# Altium PCB AWT25-000093_ZIM1.PcbDoc (part 3 of 4)
Units mm, origin at the board's own origin, x right, y up, seen from the top; angles counter-clockwise.
Board outline 210 x 108 mm, 6 copper layers (Top Layer, Mid-Layer 1, Internal Plane 2, Power, Mid-Layer 2, Bottom Layer); 303 components, 298 nets, 1319 pads, 1113 vias.
Unrouted connection lines stored in the file: 85.
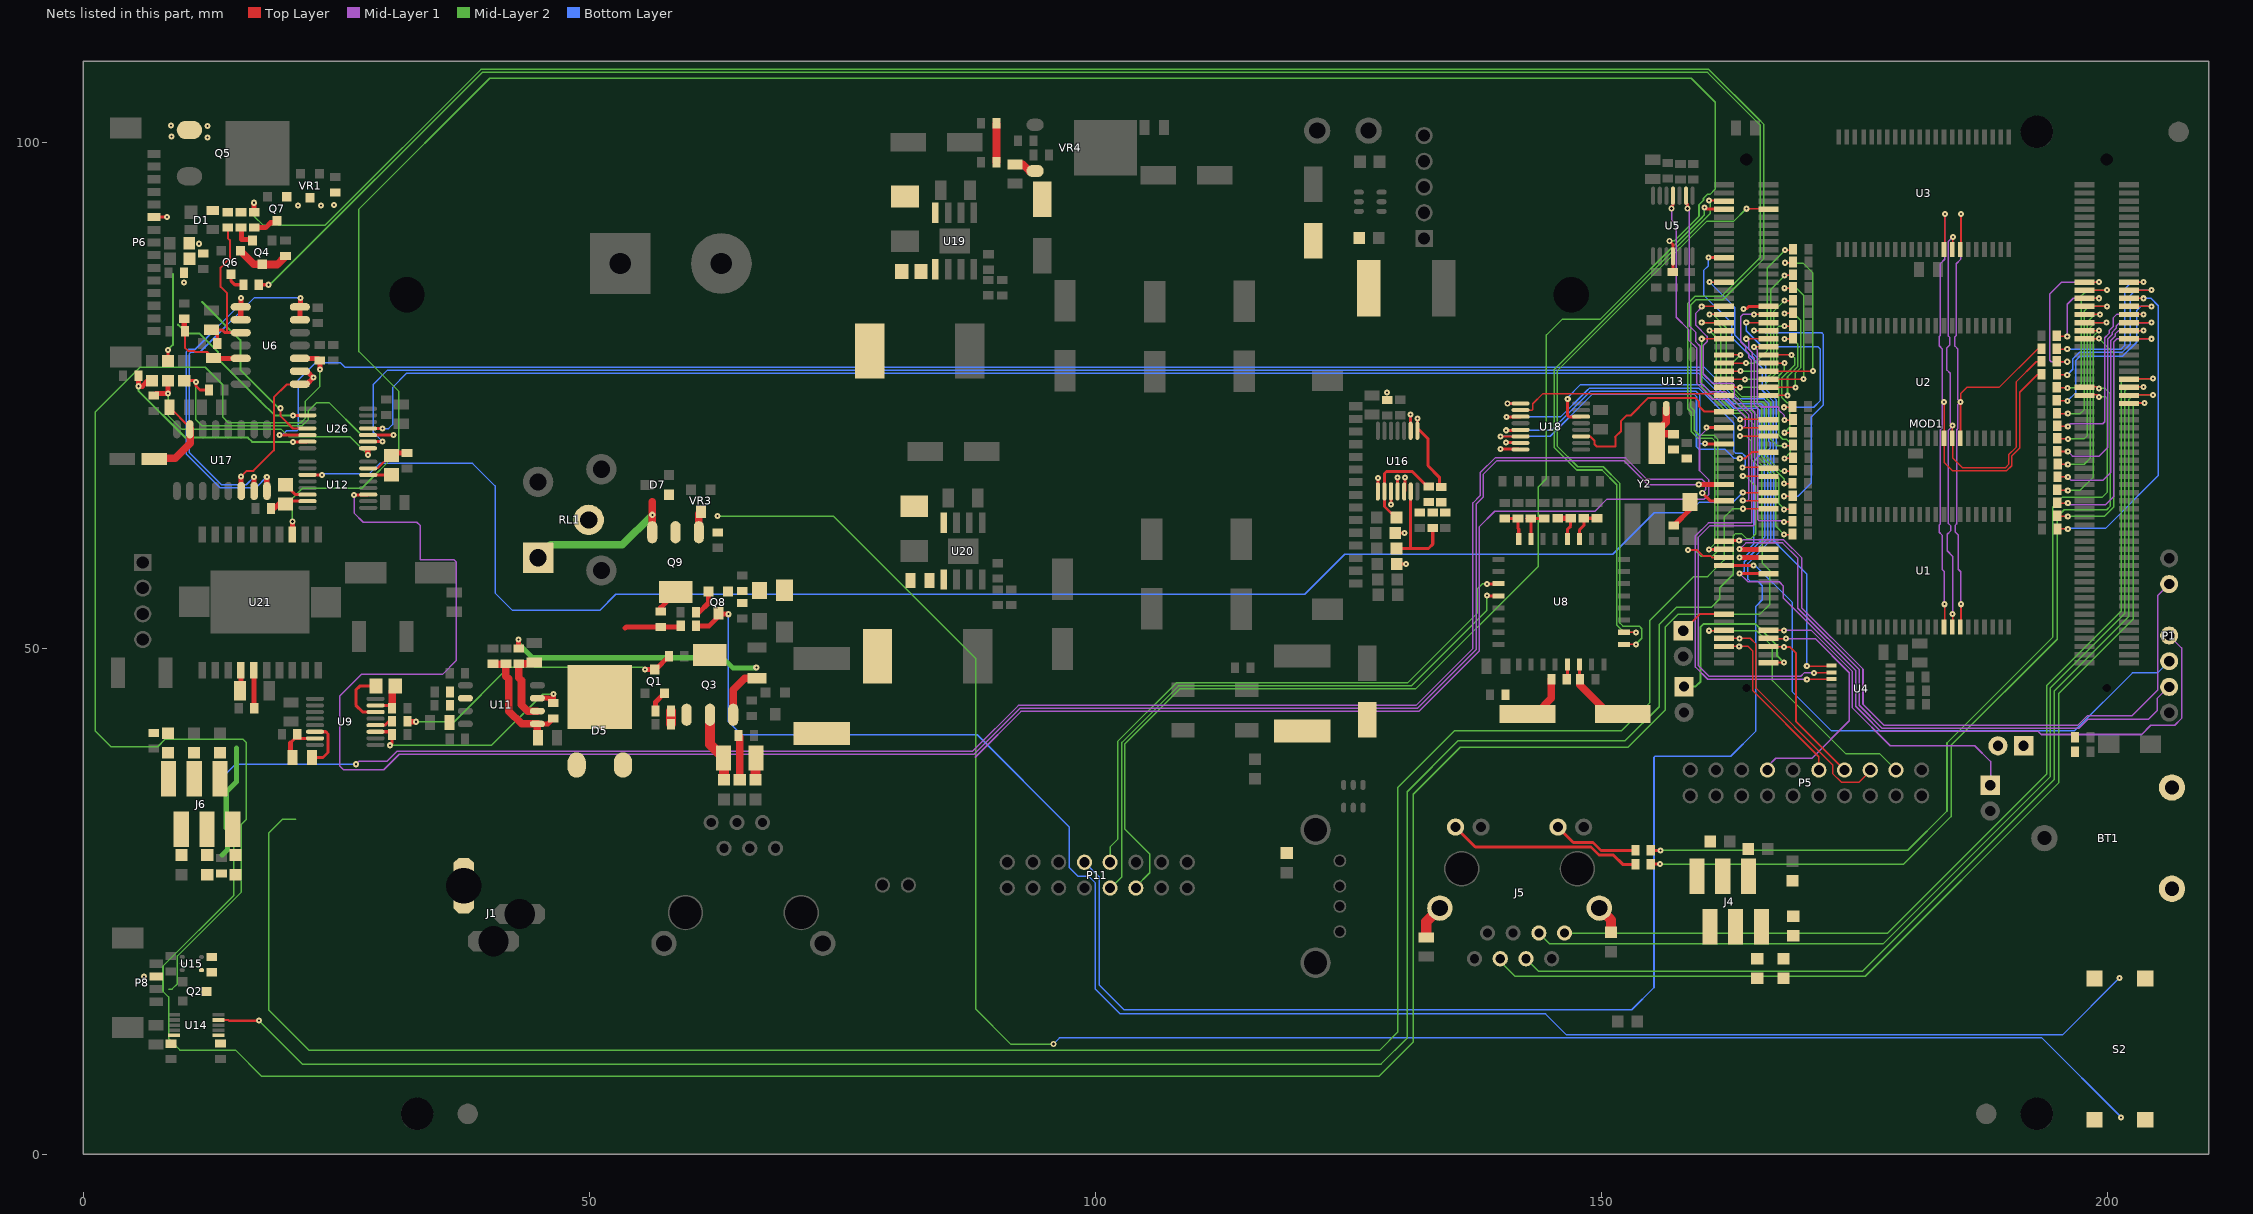
[diagram p7: the nets of this part, all layers, seen from the top]

## Via types
v1: diameter 0.6, hole 0.2, Top Layer to Bottom Layer, tented both sides, 894 vias
v2: diameter 0.6, hole 0.3, Top Layer to Bottom Layer, tented both sides, 199 vias
v3: diameter 0.6, hole 0.2, Top Layer to Bottom Layer, 18 vias
v4: diameter 0.4, hole 0.3, Top Layer to Bottom Layer, tented both sides, 2 vias

## Nets (pads, with @x,y where several pads share a name; then routed paths per layer and width w, separated by ;. In a path a pad name is that pad's centre, name@x,y a point inside that pad or via, vN(x,y) a via of type N, cw(c..) or ccw(c..) an arc to the next point about the centre after c; other vN are vias at no path point) (continued)
D13: R25.2 U1.36 U2.36 U3.36 | length 69
  Top Layer w0.15: v1(183.835,74.332) 183.86,70.744 183.861,70.699 183.872,70.688 183.861,70.676 183.861,68.338 184.668,67.53 190.013,67.53 190.515,68.033 190.515,68.982 191.303,69.769 191.303,75.272 193.047,77.016 193.455,77.016 R25.2@193.501,77.016 ; U1.36@183.872,52.038 183.877,52.043 183.886,52.052 183.886,52.094 v1(183.886,54.342) ; U3.36@183.872,89.338 183.877,89.343 183.886,89.352 183.886,89.393 v1(183.911,92.874)
  Mid-Layer 1 w0.15: v1@183.81,74.307 v1@183.81,74.332 ; v1@183.861,74.332 183.848,74.319 183.632,74.103 183.632,71.741 183.48,71.589 183.48,62.292 183.353,62.165 183.353,61.454 183.632,61.175 183.632,57.797 183.873,57.556 183.873,54.342 v1@183.873,54.329 ; v1@183.886,74.332 183.861,74.357 183.657,74.561 183.657,79.564 183.353,79.869 183.353,80.784 183.48,80.911 183.48,87.997 183.911,88.429 v1(183.911,92.874)
D14: R27.2 U1.37 U2.37 U3.37 | length 62.2
  Top Layer w0.15: v1(184.648,71.995) 184.648,70.744 184.648,70.711 184.672,70.688 184.672,68.822 185.664,67.83 189.888,67.83 190.211,68.152 190.211,69.101 190.947,69.838 190.947,76.288 192.949,78.29 193.442,78.29 R27.2@193.488,78.29 ; U1.37@184.672,52.038 184.673,52.039 184.673,52.094 v1(184.673,53.377) ; U3.37@184.672,89.338 184.673,89.339 184.674,89.393 v1(184.699,90.639)
  Mid-Layer 1 w0.15: 184.267,71.538 184.267,62.318 184.47,62.115 184.47,61.581 184.14,61.251 184.14,59.625 184.698,59.067 v1@184.698,53.377 ; 184.318,71.589 v1@184.682,71.953 ; v1@184.648,53.326 v1@184.648,53.377 ; v1@184.648,90.588 184.259,90.199 184.259,80.834 184.411,80.682 184.411,79.971 184.11,79.67 184.11,77.478 184.436,77.151 184.436,72.198 184.644,71.991 v1@184.682,71.953 ; v1@184.69,71.944 v1@184.682,71.953 ; v1@184.699,71.97 184.686,71.957 v1@184.682,71.953
D15: R29.2 U1.38 U2.38 U3.38 | length 59.6
  Top Layer w0.15: v1(185.461,74.332) 185.461,75.145 186.07,75.754 189.271,75.754 193.056,79.54 193.442,79.54 R29.2@193.488,79.54
  Top Layer w0.2: v1(185.461,74.332) 185.461,70.744 185.461,70.699 U2.38@185.472,70.688 ; U1.38@185.472,52.038 185.477,52.043 185.486,52.052 185.486,52.094 v1(185.486,54.342) ; U3.38@185.472,89.338 185.477,89.343 185.486,89.352 185.486,89.394 v1(185.486,92.874)
  Mid-Layer 1 w0.15: v1(185.461,74.332) v1@185.435,74.307 ; v1@185.461,92.849 185.461,88.404 185.029,87.972 185.029,80.885 184.902,80.758 184.902,79.844 185.207,79.539 185.207,74.535 v1@185.435,74.307 ; v1@185.473,54.329 185.473,54.342 185.473,57.556 185.232,57.797 185.232,61.175 184.953,61.454 184.953,62.165 185.08,62.292 185.08,71.589 185.207,71.716 185.207,74.078 v1@185.435,74.307
DA0: MOD1.A68 R3.2 | length 9.7
  Top Layer w0.15: MOD1.A68@166.5,74.965 166.502,74.967 v1(168.367,74.967) ; v1@168.076,80.543 168.901,80.543 R3.2@168.947,80.543
  Mid-Layer 2 w0.15: v1(168.062,80.53) 168.9,80.53 169.362,80.068 169.362,77.809 168.367,76.814 v1(168.367,74.967)
DA1: MOD1.A69 R5.2 | length 11.9
  Top Layer w0.15: MOD1.A69@162.1,75.765 v1(163.693,75.754) ; v1(168.062,81.825) 168.901,81.825 168.912,81.825 168.919,81.818 R5.2@168.947,81.818
  Mid-Layer 2 w0.15: v1(163.693,75.754) 165.837,75.765 167.325,77.253 167.325,81.622 167.528,81.825 v1(168.062,81.825)
DA2: MOD1.A70 R7.2 | length 12.3
  Top Layer w0.15: MOD1.A70@166.5,75.765 166.511,75.754 v1(169.154,75.754) ; v1(168.062,83.07) 168.901,83.07 168.946,83.07 R7.2@168.947,83.068
  Mid-Layer 2 w0.15: v1(168.062,83.07) 168.976,83.07 169.662,82.384 169.662,77.685 169.154,77.177 v1(169.154,75.754)
DA3: MOD1.A71 R10.2 | length 13.7
  Top Layer w0.15: MOD1.A71@162.1,76.565 v1(164.176,76.542) ; v1(168.062,84.34) 168.901,84.34 168.926,84.34 R10.2@168.947,84.318
  Mid-Layer 2 w0.15: v1(164.176,76.542) 166.213,76.565 167.02,77.372 167.02,83.298 v1(168.062,84.34) v1@168.189,84.34
DA4: MOD1.A72 R12.2 | length 14.8
  Top Layer w0.15: MOD1.A72@166.5,76.565 v1@169.939,76.565 ; v1(168.062,85.559) 168.901,85.559 168.938,85.559 R12.2@168.947,85.568
  Mid-Layer 2 w0.15: v1@168.062,85.533 v1(168.062,85.559) 169.256,85.559 169.967,84.848 v1(169.967,76.593)
DA5: MOD1.A73 R14.2 | length 15.5
  Top Layer w0.15: MOD1.A73@162.1,77.365 v1(163.744,77.38) ; v1(168.087,86.829) 168.917,86.829 168.952,86.829 R14.2@168.963,86.84
  Mid-Layer 2 w0.15: v1(163.744,77.38) 166.589,77.365 166.69,77.467 166.69,85.406 168.087,86.803 v1(168.087,86.829) v1@168.138,86.829
DA6: MOD1.A74 R16.2 | length 18.1
  Top Layer w0.15: MOD1.A74@166.5,77.365 v1@170.866,77.365 ; v1(168.113,88.073) 168.9,88.073 R16.2@168.917,88.09 ; R16.2@168.917,88.09 R16.2@168.963,88.09
  Mid-Layer 2 w0.15: v1@168.087,88.048 168.113,88.048 169.891,88.048 170.881,87.057 v1(170.881,77.38)
DA7: MOD1.A75 R18.2 | length 16.3
  Top Layer w0.15: MOD1.A75@162.1,78.165 v1(164.252,78.167) ; v1(168.113,89.318) 168.917,89.318 168.941,89.318 R18.2@168.963,89.34
  Mid-Layer 2 w0.15: v1(164.252,78.167) 165.138,78.165 166.385,79.412 166.385,87.591 v1(168.113,89.318)
DA8: MOD1.A76 R20.2 | length 13.2
  Top Layer w0.15: MOD1.A76@166.5,78.165 v1@168.059,78.165 ; v1(168.062,68.744) 168.917,68.744 168.942,68.744 R20.2@168.963,68.765
  Mid-Layer 2 w0.15: v1@167.96,68.744 v1(168.062,68.744) 168.646,69.328 168.646,70.268 168.265,70.649 167.9,70.649 167.5,71.049 167.5,76.92 168.062,77.482 v1(168.062,78.167)
DA9: MOD1.A77 R22.2 | length 15.7
  Top Layer w0.15: MOD1.A77@162.1,78.965 v1(163.718,78.98) ; v1(168.062,70.014) 168.892,70.014 168.937,70.014 R22.2@168.938,70.015
  Mid-Layer 2 w0.15: v1(163.718,78.98) 162.88,78.142 162.88,75.82 163.885,74.815 166.16,74.815 166.725,74.25 166.725,70.614 167.325,70.014 v1(168.062,70.014)
DA10: MOD1.A78 R24.2 | length 12.2
  Top Layer w0.15: MOD1.A78@166.5,78.965 v1@168.763,78.965 ; v1(168.062,71.284) 168.892,71.284 168.932,71.284 R24.2@168.938,71.29
  Mid-Layer 2 w0.15: v1@167.909,71.284 v1(168.062,71.284) 168.6,71.822 168.6,74.075 168.419,74.256 168.294,74.256 167.8,74.75 167.8,76.7 168.368,77.268 168.382,77.268 169.062,77.948 169.062,78.666 v1(168.773,78.955)
DA11: MOD1.A80 R26.2 | length 11.8
  Top Layer w0.15: v1(165.073,79.765) MOD1.A80@166.5,79.765 ; v1(168.062,72.529) 168.892,72.529 168.927,72.529 R26.2@168.938,72.54
  Mid-Layer 1 w0.15: v1(165.073,79.765) 165.4,79.438 165.4,74.178 165.752,73.826 167.452,73.826 167.512,73.766 167.512,73.541 168.062,72.991 v1(168.062,72.529)
DA12: MOD1.A81 R28.2 | length 26.9
  Top Layer w0.15: v1(159.893,80.565) MOD1.A81@162.1,80.565 ; v1(168.036,61.226) 168.04,61.229 168.876,61.229 R28.2@168.922,61.229
  Mid-Layer 2 w0.15: v1(159.893,80.565) 159.893,75.807 162.511,73.189 163.947,73.189 165.1,72.036 165.1,68.8 167.2,66.7 167.2,62.062 v1@168.033,61.229 ; v1@167.805,61.229 v1@168.033,61.229 ; v1(168.036,61.226) v1@168.033,61.229 ; v1@168.04,61.229 168.036,61.229 v1@168.033,61.229
DA13: MOD1.A82 R30.2 | length 24.1
  Top Layer w0.15: v1(164.293,80.565) MOD1.A82@166.5,80.565 ; v1(168.036,62.47) 168.876,62.47 168.913,62.47 R30.2@168.922,62.479
  Mid-Layer 1 w0.15: v1(164.293,80.565) 164.539,80.32 164.539,79.552 164.862,79.229 164.862,78.878 165.096,78.644 165.096,74.033 165.328,73.801 ; 165.328,73.826 165.328,73.801 ; v1(168.036,62.47) 167.935,62.572 165.577,62.572 165.425,62.724 165.425,73.704 165.328,73.801
DA14: MOD1.A83 R31.2 | length 24.1
  Top Layer w0.15: v1(160.673,81.365) MOD1.A83@162.1,81.365 ; v1(168.036,63.715) 168.876,63.715 168.908,63.715 R31.2@168.922,63.729
  Mid-Layer 2 w0.15: v1(160.673,81.365) 161.331,80.707 161.331,75.069 162.906,73.494 164.831,73.494 165.4,72.925 165.4,68.925 167.5,66.825 167.5,64.28 168.036,63.744 v1(168.036,63.715)
DA15: MOD1.A84 R32.2 | length 27.7
  Top Layer w0.15: v1(165.073,81.365) MOD1.A84@166.5,81.365 ; v1(168.036,65.01) 168.876,65.01 168.915,65.01 R32.2@168.922,65.004
  Bottom Layer w0.15: v1(165.073,81.365) 165.982,81.365 166.182,81.165 171.745,81.165 171.918,80.992 171.918,74.048 170.703,72.833 170.703,66.306 169.408,65.01 v1(168.036,65.01)
DA16: MOD1.A85 R33.2 | length 24.4
  Top Layer w0.15: v1(159.893,82.165) MOD1.A85@162.1,82.165 ; v1(168.036,66.255) 168.876,66.255 168.921,66.255 R33.2@168.922,66.254
  Mid-Layer 2 w0.15: v1(159.893,82.165) 161.346,82.165 161.763,81.749 161.763,75.787 163.65,73.9 165.65,73.9 165.825,73.725 165.825,68.925 168.036,66.714 v1(168.036,66.255)
DA17: MOD1.A86 R34.2 | length 20.9
  Top Layer w0.15: v1(164.293,82.165) MOD1.A86@166.5,82.165 ; v1(168.036,73.799) 168.867,73.799 168.897,73.799 R34.2@168.913,73.815
  Bottom Layer w0.15: v1(164.293,82.165) 164.293,81.352 165.877,79.768 171.389,79.768 171.618,79.539 171.618,74.459 170.957,73.799 v1(168.036,73.799)
DA18: MOD1.A87 R35.2 | length 22.5
  Top Layer w0.15: v1(160.673,82.965) MOD1.A87@162.1,82.965 ; v1(168.062,67.499) 168.892,67.499 168.922,67.499 R35.2@168.938,67.515
  Mid-Layer 2 w0.15: v1(160.673,82.965) 161.01,82.965 162.321,81.654 162.321,75.954 163.918,74.357 165.918,74.357 166.275,74 166.275,69.825 166.2,69.75 166.2,68.974 167.675,67.499 v1(168.062,67.499)
DA19: MOD1.A88 U4.2 | length 56.5
  Top Layer w0.15: v1(165.073,82.965) MOD1.A88@166.5,82.965 ; v1(170.983,47.56) 172.729,47.565 U4.2@172.775,47.565
  Mid-Layer 1 w0.15: v1(165.073,82.965) 163.944,82.965 163.75,82.771 163.75,80.275 164.239,79.786 164.239,79.411 164.562,79.088 164.562,78.688 164.796,78.454 164.796,73.657 165.125,73.328 ; 165.125,73.354 165.125,73.328 ; v1(170.983,47.56) 170.01,47.56 169.675,47.225 160.611,47.225 159.575,48.261 159.575,60.976 160.674,62.075 164.949,62.075 165.125,62.251 165.125,73.328
  Bottom Layer w0.15: v1@165.07,82.968 v1(165.073,82.965)
DA20: MOD1.A89 U4.3 | length 60.6
  Top Layer w0.15: v1(159.893,83.765) MOD1.A89@162.1,83.765 ; v1(170.272,46.925) 172.729,46.915 U4.3@172.775,46.915
  Mid-Layer 1 w0.15: v1(159.893,83.765) 159.893,83.668 159.325,83.1 159.325,81.9 160.425,80.8 160.425,80.275 160.05,79.9 160.05,77.05 160.95,76.15 162.95,76.15 163.125,75.975 163.125,74.904 164.825,73.204 164.825,62.401 164.799,62.375 160.55,62.375 159.275,61.1 159.275,48.137 160.486,46.925 v1(170.272,46.925)
DA21: MOD1.A90 | length 2.6
  Top Layer w0.3: v1@164.003,83.548 164.028,83.548 164.345,83.548 164.561,83.765 MOD1.A90@166.5,83.765
  other v1: 164.028,83.523
DISPLAY_CSBAR: MOD1.A67 U18.2 | length 21.2
  Top Layer w0.15: U18.2@141.963,73.551 U18.2@141.993,73.521 143.129,73.521 143.208,73.601 143.208,74.151 144.207,75.15 151.05,75.15 151.106,75.15 ; 151.051,75.151 161.853,75.151 MOD1.A67@162.028,74.976
DISPLAY_INTBAR: MOD1.A62 U18.14 | length 24.9
  Top Layer w0.15: v1(163.675,72.6) 166.465,72.6 MOD1.A62@166.5,72.565
  Top Layer w0.3: v1(146.657,74.601) 146.657,72.976 146.782,72.851 U18.14@147.932,72.851
  Bottom Layer w0.15: v1(146.657,74.601) 146.657,74.776 147.882,76 160.079,76 163.479,72.6 v1(163.675,72.6)
DISPLAY_RESETBAR: MOD1.A50 U18.3 | length 34.3
  Top Layer w0.15: v1(163.925,67.85) 166.415,67.85 MOD1.A50@166.5,67.765
  Top Layer w0.3: v1(140.609,72.851) 141.973,72.851 U18.3@141.993,72.871
  Bottom Layer w0.15: v1(140.609,72.851) 145.951,72.851 148.541,75.441 ; 148.591,75.484 148.807,75.7 ; 148.832,75.7 159.6,75.7 163.078,72.222 163.078,69.422 163.221,69.279 163.871,69.279 164.196,68.954 164.196,68.121 v1(163.925,67.85)
DISPLAY_SCLK: MOD1.A63 U18.11 | length 18.7
  Top Layer w0.2: U18.11@147.857,70.927 U18.11@147.882,70.902 ; U18.11@147.983,70.921 148.862,70.921 149.307,70.477 149.307,70.127 149.507,69.927 151.356,69.927 151.356,70.869 151.352,70.873 151.931,71.452 151.931,72.451 152.456,72.976 152.856,72.976 154.605,74.726 159.254,74.726 159.604,74.376 159.604,73.926 160.165,73.365 MOD1.A63@162.1,73.365
DISPLAY_SDI: MOD1.A55 U18.5 | length 30
  Top Layer w0.3: v1(140.584,71.526) 141.948,71.526 U18.5@141.993,71.571 ; 160.541,70.165 160.202,70.152 160.15,70.15 160.2,70.15 MOD1.A55@162.1,70.165
  Bottom Layer w0.15: v1(140.584,71.526) 145.058,71.526 148.931,75.4 ; 148.956,75.4 159.305,75.4 159.679,75.026 159.679,70.196 159.683,70.2 v1(160.2,70.2)
DISPLAY_SDO: MOD1.A54 U18.6 | length 35.9
  Top Layer w0.2: v1(140.034,70.927) 141.987,70.927 U18.6@141.993,70.921 ; v1(163.653,68.752) 164.203,68.752 164.816,69.365 MOD1.A54@166.5,69.365
  Bottom Layer w0.15: v1(140.034,70.927) 144.933,70.927 149.106,75.1 ; 149.131,75.1 159.127,75.1 159.378,74.849 159.378,69.897 159.625,69.65 162.18,69.65 163.078,68.752 v1(163.653,68.752)
DM0: MOD1.B81 R1.1 | length 24.6
  Top Layer w0.15: R1.1@195.062,63.015 195.067,63.02 195.076,63.029 v1(196.053,63.029) ; MOD1.B81@197.7,80.565 197.715,80.58 v1(199.126,80.58)
  Mid-Layer 2 w0.15: v1(196.053,63.029) 199.685,63.029 200.599,63.943 200.599,79.107 v1(199.126,80.58)
DM1: MOD1.B82 R2.1 | length 27.3
  Top Layer w0.15: R2.1@195.062,64.309 195.067,64.314 195.078,64.324 v1(196.053,64.324) ; MOD1.B82@202.1,80.565 v1(204.307,80.565)
  Mid-Layer 1 w0.15: v1(196.053,64.324) 196.205,64.172 199.786,64.172 200.599,64.985 200.599,80.25 200.914,80.565 v1(204.307,80.565)
DM2: MOD1.B83 R4.1 | length 20.2
  Top Layer w0.15: R4.1@195.062,65.609 195.077,65.594 v1(196.053,65.594) ; MOD1.B83@197.7,81.365 v1(199.127,81.365)
  Mid-Layer 2 w0.15: v1(196.053,65.594) 197.272,65.594 198.593,66.915 198.593,80.831 v1(199.127,81.365)
DM3: MOD1.B84 R6.1 | length 23.9
  Top Layer w0.15: R6.1@195.087,66.89 195.092,66.895 195.112,66.915 v1(196.053,66.915) ; MOD1.B84@202.1,81.365 v1(203.527,81.365)
  Mid-Layer 1 w0.15: v1(196.053,66.915) 196.383,66.585 199.532,66.585 200.299,67.352 200.299,80.382 200.726,80.809 200.726,81.038 201.054,81.365 v1(203.527,81.365)
DM4: MOD1.B85 R8.1 | length 20.4
  Top Layer w0.15: R8.1@195.087,68.14 195.105,68.157 195.107,68.16 v1(196.053,68.16) ; MOD1.B85@197.7,82.165 199.888,82.165 v1@199.907,82.165
  Mid-Layer 2 w0.15: v1(196.053,68.16) 197.678,68.16 198.293,68.774 198.293,81.703 198.745,82.155 v1(199.888,82.155)
DM5: MOD1.B86 R9.1 | length 23.6
  Top Layer w0.15: R9.1@195.062,69.415 195.067,69.42 195.077,69.43 v1(196.053,69.43) ; MOD1.B86@202.1,82.165 v1(204.307,82.165)
  Mid-Layer 1 w0.15: v1(196.053,69.43) 196.51,68.973 199.151,68.973 199.999,69.82 199.999,80.539 200.426,80.966 200.426,81.195 200.828,81.596 200.828,81.8 201.193,82.165 v1(204.307,82.165)
DM6: MOD1.B87 R11.1 | length 17.3
  Top Layer w0.15: R11.1@195.062,70.665 195.067,70.67 195.071,70.674 v1(196.078,70.674) ; MOD1.B87@197.7,82.965 v1@199.127,82.965
  Mid-Layer 2 w0.15: v1(196.078,70.674) 197.653,70.674 197.993,71.014 197.993,82.241 198.694,82.943 v1(199.228,82.943)
DM7: MOD1.B88 R13.1 | length 20
  Top Layer w0.15: R13.1@195.062,71.915 195.066,71.919 v1(196.053,71.919) ; MOD1.B88@202.1,82.965 v1(203.527,82.965)
  Mid-Layer 1 w0.15: v1(196.053,71.919) 196.307,72.173 199.507,72.173 199.699,72.365 199.699,80.671 200.126,81.098 200.126,81.352 200.528,81.754 200.528,82.617 200.876,82.965 v1@203.517,82.965
DM8: MOD1.B89 R15.1 | length 17.2
  Top Layer w0.15: R15.1@195.037,73.165 195.038,73.164 v1(196.053,73.164) ; MOD1.B89@197.7,83.765 v1(199.907,83.765)
  Mid-Layer 2 w0.15: v1(196.053,73.164) 197.272,73.164 197.693,73.584 197.693,83.338 198.12,83.765 v1(199.907,83.765)
DM9: MOD1.B90 R17.1 | length 19.1
  Top Layer w0.15: R17.1@195.012,74.44 195.018,74.434 v1(196.027,74.434) ; MOD1.B90@202.1,83.765 v1(204.307,83.765)
  Bottom Layer w0.15: v1(196.027,74.434) 196.855,75.262 196.855,78.448 197.239,78.831 201.463,78.831 202.86,80.229 202.86,80.356 ; 202.834,80.33 202.86,80.356 ; v1(204.307,83.765) 203.276,83.765 202.86,83.349 202.86,80.356
DM10: MOD1.B91 R19.1 | length 9
  Top Layer w0.15: R19.1@195.012,80.815 195.018,80.809 v1(196.002,80.809) ; MOD1.B91@197.7,84.565 v1(199.127,84.565)
  Mid-Layer 1 w0.15: v1(196.002,80.809) 196.002,83.984 196.586,84.568 199.124,84.568 v1(199.127,84.565)
DM11: MOD1.B92 R21.1 | length 32.1
  Top Layer w0.15: R21.1@195.025,61.775 195.038,61.788 v1(196.052,61.788) ; MOD1.B92@202.1,84.565 v1(203.527,84.565)
  Bottom Layer w0.15: v1(196.052,61.788) 196.093,61.829 199.776,61.829 204.993,67.046 204.993,83.835 204.263,84.565 v1(203.527,84.565)
DM12: MOD1.B93 R23.1 | length 16.2
  Top Layer w0.15: R23.1@195.012,75.715 195.023,75.704 v1(196.027,75.704) ; MOD1.B93@197.7,85.365 v1(199.907,85.365)
  Mid-Layer 2 w0.15: v1(196.027,75.704) 196.992,75.704 197.393,76.104 197.393,84.791 197.967,85.365 v1(199.907,85.365)
DM13: MOD1.B94 R25.1 | length 18.4
  Top Layer w0.15: R25.1@195.025,77.016 195.042,76.999 v1(196.002,76.999) ; MOD1.B94@202.1,85.365 v1(204.307,85.365)
  Bottom Layer w0.15: v1(196.002,76.999) 196.555,77.552 196.555,78.572 197.195,79.212 201.412,79.212 202.225,80.025 202.225,84.848 202.742,85.365 v1(204.307,85.365)
DM14: MOD1.B95 R27.1 | length 16.1
  Top Layer w0.15: R27.1@195.012,78.29 195.016,78.294 v1(196.002,78.294) ; MOD1.B95@197.7,86.165 v1(199.127,86.165)
  Mid-Layer 1 w0.15: v1(196.002,78.294) 194.427,78.294 194.275,78.447 194.275,84.975 195.465,86.165 v1(199.127,86.165)
DM15: MOD1.B96 R29.1 | length 15.9
  Top Layer w0.15: R29.1@195.012,79.54 195.013,79.539 v1(196.002,79.539) ; MOD1.B96@202.1,86.165 v1(203.527,86.165)
  Bottom Layer w0.15: v1(196.002,79.539) 201.31,79.539 201.666,79.895 201.666,85.457 202.374,86.165 v1(203.527,86.165)
DOT_SENSE: U6.8 U6.9 U17.8 | length 31.4
  Top Layer w0.5: U6.9@15.579,82.44 U6.8@15.579,83.71 15.6,83.731 v1(15.6,84.6) ; U17.8@18.15,65.547 v1(18.15,66.925)
  Bottom Layer w0.15: v1(15.6,84.6) 15.6,84.05 11.075,79.525 10.45,79.525 10.175,79.25 10.175,69.2 13.525,65.85 17.075,65.85 v1(18.15,66.925)
  Bottom Layer w0.2: v1(18.15,66.925) v1@18.15,66.975
DPOT_CSBAR: MOD1.A48 U14.4 | length 206.6
  Top Layer w0.15: v1(163.95,67) 166.465,67 MOD1.A48@166.5,66.965
  Top Layer w0.2: U14.4@13.35,13.25 13.375,13.25 14.386,13.25 14.436,13.2 17.348,13.2 v1(17.365,13.218)
  Mid-Layer 2 w0.15: v1(17.365,13.218) 21.658,8.925 128.225,8.925 130.8,11.5 130.8,35.826 135.824,40.85 152.325,40.85 155.7,44.225 155.7,52.351 157.399,54.05 160.85,54.05 161.675,54.875 161.675,55.976 163,57.301 163,61.101 163.224,61.325 163.825,61.325 164.325,60.825 164.75,60.825 165.225,61.3 165.225,66 164.225,67 v1(163.95,67) v1@163.925,67
EEPROM_CSBAR: MOD1.A101 P11.8 | length 157.1
  Top Layer w0.3: v1(160.55,88.6) 162.065,88.6 MOD1.A101@162.1,88.565
  Bottom Layer w0.15: P11.8@98.917,28.853 100.4,27.37 100.4,16.71 102.819,14.291 152.981,14.291 155.18,16.491 ; 155.18,16.466 155.18,16.491 ; 155.18,39.185 155.18,16.491 ; 155.18,39.21 155.305,39.335 162.753,39.335 165.253,41.834 165.253,54.153 165.875,54.775 165.875,56.175 165.425,56.625 164.656,56.625 164.453,56.828 164.453,58.38 166.7,60.627 166.7,69.4 166.975,69.675 166.975,74.378 165.877,75.476 165.877,77.675 162.861,80.692 162.861,82.116 ; 160.55,87.744 160.55,87.775 ; v1(160.55,88.6) 160.55,87.775 ; 162.88,82.097 162.861,82.116 ; 160.55,87.775 160.075,87.3 160.075,84.902 162.861,82.116
ETH_CAN_SCREEN: C46.1 J5.13 J5.14 L37.2 | length 6.2
  Top Layer w1: C46.1@132.686,21.514 132.686,22.985 J5.13@133.986,24.285 ; J5.14@149.775,24.325 150.931,23.169 L37.2@150.931,21.955
ETH_LED_LINK: J5.9 R46.2 | length 8.6
  Top Layer w0.3: J5.9@145.695,32.325 147.208,30.812 149.157,30.812 149.943,30.026 R46.2@153.338,30.026
ETH_LED_SPEED: J5.11 R45.2 | length 19.3
  Top Layer w0.3: J5.11@135.565,32.325 137.528,30.362 148.957,30.362 149.743,29.576 151.168,29.576 152.092,28.652 R45.2@153.338,28.652
ETH_RX_N: J5.6 MOD1.B66 | length 107
  Top Layer w0.15: MOD1.B66@202.054,74.221 202.1,74.221 203.609,74.221 v1(203.622,74.209)
  Mid-Layer 2 w0.15: J5.6@139.995,19.325 139.995,19.054 141.459,17.59 176.05,17.59 195.145,36.685 195.145,45.508 202.518,52.881 202.518,73.951 202.776,74.209 v1(203.622,74.209)
ETH_RX_P: J5.4 MOD1.B68 | length 106.1
  Top Layer w0.15: MOD1.B68@202.054,75.021 202.1,75.021 v1(204.46,75.021)
  Mid-Layer 2 w0.15: J5.4@142.535,19.325 143.795,18.065 175.75,18.065 194.72,37.035 194.72,45.783 202.093,53.156 202.093,74.576 202.539,75.021 v1(204.46,75.021)
ETH_TX_N: J5.3 MOD1.B70 | length 102.4
  Top Layer w0.15: MOD1.B70@202.054,75.821 202.1,75.821 203.533,75.821 v1(203.545,75.809)
  Mid-Layer 2 w0.15: J5.3@143.833,21.839 144.883,20.79 177.799,20.79 194.345,37.335 194.345,46.083 201.668,53.406 201.668,75.376 202.101,75.809 v1(203.545,75.809)
ETH_TX_P: J5.1 MOD1.B72 | length 101.6
  Top Layer w0.15: MOD1.B72@202.054,76.621 202.1,76.621 v1@204.459,76.621
  Mid-Layer 2 w0.15: J5.1@146.345,21.865 178.275,21.865 193.97,37.56 193.97,46.308 201.318,53.656 201.318,76.25 201.69,76.622 v1(204.46,76.622)
EXP_DATA_N: P11.10 U8.19 | length 57.7
  Top Layer w0.15: U8.19@139.805,56.355 U8.19@139.822,56.372
  Top Layer w0.3: v1(138.7,56.35) 138.705,56.355 U8.19@139.805,56.355
  Mid-Layer 2 w0.15: P11.10@101.457,28.853 101.457,30.375 102.194,31.112 102.194,40.784 107.984,46.575 130.828,46.575 137.735,53.481 137.735,55.881 138.204,56.35 v1(138.7,56.35)
EXP_DATA_P: P11.9 U8.20 | length 59
  Top Layer w0.15: U8.20@139.811,55.161 U8.20@139.822,55.172
  Top Layer w0.3: v1@138.703,55.172 U8.20@139.822,55.172
  Mid-Layer 2 w0.15: P11.9@101.444,26.238 101.488,26.282 102.619,27.413 102.619,40.684 108.209,46.275 131.203,46.275 138.675,53.747 v1(138.675,55.2)
G_CS: MOD1.A95 U4.1 | length 46.2
  Top Layer w0.15: v1(160.673,86.165) MOD1.A95@162.1,86.165 ; v1(170.272,48.221) 172.729,48.215 U4.1@172.775,48.215
  Bottom Layer w0.15: v1(160.673,86.165) 163.18,83.657 163.18,80.903 166.202,77.881 166.202,75.601 167.275,74.528 167.275,69.55 167,69.275 167,60.606 168.004,59.603 168.004,59.596 ; 167.891,59.709 168.004,59.596 ; v1(170.272,48.221) 170.272,57.328 168.004,59.596
HEAD_SENSE: U6.6 U6.7 U17.7 | length 34.6
  Top Layer w0.5: U17.7@16.875,65.552 v1(16.875,66.9) ; U6.6@21.421,82.44 U6.7@21.421,83.71 21.5,83.789 v1(21.5,84.6)
  Bottom Layer w0.15: v1(16.875,66.9) 16.125,66.15 13.675,66.15 10.475,69.35 10.475,79.05 10.65,79.225 11.525,79.225 16.9,84.6 v1(21.5,84.6)
HEAD_STB1: MOD1.A44 U12.3 | length 161.8
  Top Layer w0.15: v1(163.95,65.375) 166.49,65.375 MOD1.A44@166.5,65.365
  Top Layer w0.3: U12.3@22.19,67.125 v1(23.625,67.125)
  Bottom Layer w0.15: v1@23.6,67.15 23.7,67.25 28.3,67.25 29.3,68.25 38.476,68.25 40.7,66.026 40.7,55.45 42.419,53.731 51.032,53.731 52.626,55.325 120.683,55.325 124.638,59.28 151.106,59.28 155.205,63.379 158.629,63.379 159.679,64.428 163.003,64.428 v1(163.95,65.375)
HEAD_STB2: MOD1.A45 U12.11 | length 207
  Top Layer w0.3: v1(26.775,65.125) U12.11@28.13,65.125
  Top Layer w0.5: v1(159.6,66.15) MOD1.A45@162,66.15
  Mid-Layer 1 w0.15: v1(26.775,65.125) 26.775,63.35 27.675,62.45 32.975,62.45 33.3,62.125 33.3,58.775 33.35,58.725 36.675,58.725 36.875,58.525 36.875,48.775 35.55,47.45 27.525,47.45 25.35,45.275 25.35,38.373 25.723,38 29.715,38 31.245,39.53 88.005,39.53 92.525,44.05 131.8,44.05 137.6,49.85 137.6,64.225 138.325,64.95 138.325,67.2 139.625,68.5 152.25,68.5 154.6,66.15 v1(159.6,66.15)
I2C_0V_F: J4.2 L30.2
I2C_0V_R: J6.2 L36.2
I2C_+5V_F: J4.3 L26.2
I2C_+5V_R: J6.3 L32.2 | length 0
  Top Layer w1: J6.3@10.977,37.019 J6.3@11.011,37.053
I2C_+VUN_F: J4.5 L24.2
I2C_+VUN_R: J6.5 L31.2
I2C_BON_F: J4.6 L29.2
I2C_BON_R: J6.6 L35.2
I2C_SCL_F: J4.1 L27.2
I2C_SCL_R: J6.1 L33.2
I2C_SDA_F: J4.4 L28.2
I2C_SDA_R: J6.4 L34.2
LABEL_DETECT: P8.3 R59.2 U6.3 | length 110.5
  Top Layer w0.5: U6.3@21.421,78.63 23.208,78.63 R59.2@23.4,78.438 v1@23.4,77.55
  Mid-Layer 2 w0.15: 8.45,16.325 8.8,16.325 9.325,16.85 9.325,19.6 15.65,25.925 15.65,32.6 16.1,33.05 16.1,40.7 15.775,41.025 8.125,41.025 7.375,40.275 2.75,40.275 1.2,41.825 1.2,73.325 5.625,77.75 12.075,77.75 13.8,76.025 13.8,72.825 14.35,72.275 21.514,72.275 21.964,72.726 21.964,74.414 23.4,75.85 v1(23.4,77.525)
  other v1: 6.025,17.55
LABEL_SENSE: U6.1 U6.2 U17.6 | length 17.3
  Top Layer w0.2: v1(15.6,66.95) 16.175,67.525 16.825,67.525 ; 16.831,67.531 18.85,69.55 ; 18.856,69.556 18.85,69.55 ; U6.1@21.45,76.05 21.421,76.05 20.125,76.05 18.85,74.775 18.85,69.55
  Top Layer w0.5: U17.6@15.6,65.557 v1(15.6,66.95) ; U6.1@21.421,76.09 22.115,76.09 v1(22.75,76.725) 22.115,77.36 U6.2@21.421,77.36
LATCHBAR: L14.2 P6.10 | length 10.1
  Top Layer w0.3: P6.10@7.025,92.575 v1(8.3,92.575) ; v1(8.375,79.475) 8.375,78.39 L14.2@8.4,78.365
  Mid-Layer 2 w0.2: v1(8.375,79.475) 8.875,79.975 8.875,86.975
LOADCELL_CSBAR: MOD1.A41 U16.1 | length 175.6
  Top Layer w0.3: U16.1@127.9,65.485 v1(127.9,66.8) ; v2(159.95,65.325) 160.65,64.65 160.775,64.525 MOD1.A41@162.1,64.525
  Mid-Layer 1 w0.15: v1(26.963,38.535) 27.278,38.85 30.049,38.85 31.043,39.844 87.894,39.844 92.4,44.35 131.675,44.35 137.3,49.975 137.3,64.35 138.025,65.075 138.025,67.344 139.481,68.8 152.375,68.8 154.5,66.675 159.95,66.675 160.275,66.35 160.275,65.65 v2(159.95,65.325)
  Bottom Layer w0.15: 13.55,37.025 15.06,38.535 v1(26.963,38.535)
LOADCELL_SCLK: MOD1.A40 U16.9 | length 215.7
  Top Layer w0.15: v1(163.975,63.775) 166.49,63.775 MOD1.A40@166.5,63.765
  Top Layer w0.3: v1(131.125,73.1) 131.125,71.5 U16.9@131.15,71.475
  Mid-Layer 2 w0.15: 21,33.1 19.7,33.1 18.325,31.725 18.325,14.275 22.3,10.3 128.101,10.3 129.875,12.074 129.875,36.25 135.45,41.825 151.951,41.825 154.775,44.649 154.775,52.75 159.079,57.054 160.454,57.054 160.774,57.374 160.774,57.375 162.1,58.701 162.1,62.925 162.628,63.454 ; 162.657,63.454 162.628,63.454 ; v1(163.975,63.775) 162.928,63.775 162.928,63.754 162.628,63.454
LOADCELL_SDI: MOD1.A59 R76.2 U16.4 | length 101.1
  Top Layer w0.3: U16.4@129.85,65.485 v1(129.85,66.85) ; v1(160.375,71.8) 162.1,71.8 MOD1.A59@162.2,71.8
  Mid-Layer 1 w0.15: 88.125,39.225 92.649,43.75 131.95,43.75 137.9,49.7 137.9,61.975 139.45,63.525 149.35,63.525 150.55,64.725 160.15,64.725 160.575,65.15 160.575,66.65 159.675,67.55 159.675,70.925 160.463,71.712 160.55,71.8 v1(160.375,71.8)
  other v3: 128.8,75.275
LOADCELL_SDO: MOD1.A58 U16.5 | length 246
  Top Layer w0.15: v1(163.675,70.95) 166.485,70.95 MOD1.A58@166.5,70.965
  Top Layer w0.3: U16.5@130.5,65.485 130.6,65.585 v1(130.6,66.85)
  Mid-Layer 2 w0.15: 14.9,33.675 14.9,25.6 7.9,18.6 7.9,16.1 8.45,15.55 8.45,11.425 9.575,10.3 15.05,10.3 17.65,7.7 128,7.7 131.4,11.1 131.4,35.577 136.048,40.225 152.625,40.225 156.3,43.9 156.3,52.102 157.573,53.375 165.65,53.375 166.625,54.35 166.625,57.65 165.865,58.41 165.865,62.785 165.825,62.825 165.825,67.625 164.8,68.65 164.8,70.45 164.3,70.95 v1(163.675,70.95)
MOTOR_CS: MOD1.A42 U5.9 | length 36.6
  Top Layer w0.15: v1(163.95,64.575) 166.49,64.575 MOD1.A42@166.5,64.565
  Top Layer w0.3: U5.9@158.35,94.65 158.35,93.95 158.5,93.8 v2(158.5,93.425)
  Mid-Layer 1 w0.15: v2@158.5,93.375 158.65,93.225 158.65,81.849 159.325,81.174 159.325,80.25 159.75,79.825 159.75,76.249 160.649,75.35 162.254,75.35 164.525,73.079 164.525,64.7 164.4,64.575 v1(163.95,64.575)
MOTOR_EN: MOD1.A60 U5.11 | length 30
  Top Layer w0.15: v1@163.685,71.765 MOD1.A60@166.5,71.765
  Top Layer w0.3: v2(156.925,93.425) 156.925,93.65 157.05,93.775 U5.11@157.05,94.7
  Mid-Layer 1 w0.15: v2@156.925,93.375 156.925,92.3 157.375,91.85 157.375,82.699 158.6,81.474 158.6,80.45 159.425,79.625 159.425,76.15 160.987,74.587 162.437,74.587 164.2,72.825 164.2,72 163.966,71.766 163.675,71.766 v1@163.666,71.766 ; v1@163.666,71.765 163.675,71.765 v1@163.685,71.765
  other v1: 163.675,71.775
NetBT1_1: BT1.1 BT1.2 P3.2
NetC7_1: C7.1 R51.1 U9.7 | length 3.9
  Top Layer w0.3: 20.476,40.638 20.933,41.095 21.162,41.095 U9.7@22.911,41.095
  Top Layer w0.5: C7.1@20.476,39.375 20.476,40.638
NetC7_2: C7.2 U9.6 | length 5
  Top Layer w0.3: C7.2@22.601,39.2 23.701,39.2 24.201,39.7 24.201,41.515 23.971,41.745 U9.6@22.911,41.745
NetC10_2: C10.2 U21.14 | length 1.3
  Top Layer w0.5: U21.14@15.595,47.825 15.625,47.795 C10.2@15.625,46.575
NetC11_1: C11.1 U21.15 | length 3.8
  Top Layer w0.5: U21.15@16.865,47.825 16.875,47.815 C11.1@16.875,44.075
NetC17_1: C17.1 L7.1 R105.2
NetC18_1: C18.1 R88.1 U8.12 | length 3.5
  Top Layer w0.3: U8.12@146.622,60.772 146.622,61.728 146.95,62.056 146.95,62.813 146.972,62.835 R88.1@146.975,62.838 ; U8.12@146.652,60.749 U8.12@146.652,60.772
  Top Layer w0.5: C18.1@145.672,62.835 146.972,62.835 R88.1@146.975,62.838
NetC19_1: C19.1 R37.1 U8.11 | length 3.5
  Top Layer w0.3: U8.11@147.822,60.772 147.822,61.69 148.247,62.115 R37.1@148.247,62.835 ; R37.1@148.275,62.835 C19.1@149.547,62.835
NetC20_1: C20.1 R40.1 U8.16 | length 3.4
  Top Layer w0.3: C20.1@140.447,62.81 R40.1@141.747,62.81 141.747,61.836 141.822,61.761 U8.16@141.822,60.772
NetC21_1: C21.1 R41.1 U8.15 | length 3.8
  Top Layer w0.3: R41.1@142.572,62.81 R41.1@143.022,62.81 ; U8.15@143.022,60.772 R41.1@143.022,62.81 ; C21.1@144.347,62.81 R41.1@143.022,62.81
NetC22_1: C22.1 L9.1 R106.2
NetC23_1: C23.1 U8.30 Y1.2 | length 5.8
  Top Layer w0.3: C23.1@147.822,46.991 U8.30@147.822,48.372
  Top Layer w0.75: C23.1@147.863,46.95 147.863,46.387 Y1.2@150.575,43.675
NetC24_1: C24.1 R44.1 Y1.1 | length 3.9
  Top Layer w0.75: Y1.1@143.625,43.625 145.038,45.038 R44.1@145.038,46.95
NetC27_1: C27.1 R47.1 U9.15 | length 3.2
  Top Layer w0.3: U9.15@28.901,44.345 30.446,44.345 R47.1@30.451,44.35
  Top Layer w0.75: R47.1@30.539,44.075 C27.1@30.539,45.737
NetC27_2: C27.2 U9.14 | length 5.6
  Top Layer w0.3: C27.2@28.651,46.25 27.326,46.25 26.951,45.875 26.951,44.375 27.631,43.695 U9.14@28.901,43.695
NetC29_1: C29.1 R95.1 U12.15 | length 3.9
  Top Layer w0.2: U12.15@28.2,67.8 29.125,67.8 C29.1@30.35,69.025
  Top Layer w0.5: C29.1@30.712,69.262 R95.1@32,69.262
NetC29_2: C29.2 U12.14 | length 2.2
  Top Layer w0.3: U12.14@28.175,67.12 C29.2@30.42,67.12
NetC30_1: C30.1 R96.1 U12.7 | length 3.8
  Top Layer w0.3: C30.1@19.98,64.52 20,64.52 U12.7@22.185,64.52
  Top Layer w0.5: R96.1@18.562,63.8 18.875,63.8 19.325,64.25 C30.1@20,64.25
NetC30_2: C30.2 U12.6 | length 2.6
  Top Layer w0.3: C30.2@20,66.15 20.98,65.17 U12.6@22.185,65.17
NetC32_1: C32.1 R62.1 R101.1 U6.10 | length 15.6
  Top Layer w0.2: 14.2,81.17 14.2,85.1 13.6,85.7 13.6,87.6 14.5,88.5 14.5,90.3 14.3,90.5 R62.1@14.3,91.538
  Top Layer w0.3: R101.1@13.262,80.1 13.262,80.888 C32.1@12.7,81.45 13.75,81.45 14.03,81.17 14.2,81.17 U6.10@15.579,81.17
NetC33_1: C33.1 C34.1 U17.15 | length 8.3
  Top Layer w0.2: C33.1@8.55,73.8 10.55,71.8 U17.15@10.55,71.623
  Top Layer w0.75: C34.1@7.3,68.75 9.1,68.75 10.575,70.225 10.575,71.623 U17.15@10.575,71.65
NetC35_1: C35.1 R69.1 R103.2 U6.12 | length 8.8
  Top Layer w0.2: R103.2@10.062,81.3 10.062,79.688 10.375,79.375 10.975,79.375 11.075,79.275 12.275,79.275 C35.1@12.9,78.65
  Top Layer w0.5: R69.1@10,82.538 10,81.362 R103.2@10.062,81.3 ; C35.1@12.9,78.65 12.92,78.63 U6.12@15.579,78.63
NetC37_1: C37.1 U13.2 Y2.4 | length 5.2
  Top Layer w0.75: Y2.4@155.455,70.228 155.455,71.402 156.395,72.341 U13.2@156.395,73.683 ; Y2.4@155.78,71.127 155.83,71.177 C37.1@157.055,71.177 ; Y2.4@155.825,68.768 Y2.4@155.875,68.818
NetC37_2: C37.2 C38.1
NetC39_1: C39.1 R74.1 U11.6 | length 7.4
  Top Layer w0.75: C39.1@44.438,48.463 R74.1@43.025,48.463 43.025,47.092 43.309,46.808 43.309,44.409 43.927,43.79 U11.6@44.881,43.79
NetC40_1: C40.1 R56.2 R70.2 R83.1 U11.5 | length 12.6
  Top Layer w0.5: U11.5@44.881,42.52 45.907,42.52 R70.2@46.45,43.063
  Top Layer w0.75: R56.2@40.485,48.432 40.5,48.432 R83.1@41.744,48.432 ; R83.1@41.775,48.463 41.775,47.242 42.059,46.958 42.059,43.784 43.323,42.52 U11.5@44.881,42.52 ; C40.1@44.881,41.194 U11.5@44.881,42.52 ; U11.5@44.933,42.52 U11.5@44.881,42.52
NetC44_1: C44.1 D3.1 L38.1 U19.8
NetC44_2: C44.2 U19.1
NetC55_1: C55.1 D8.1 Q8.1 R90.2 R110.1
NetC56_1: C56.1 D6.1 L40.1 U20.8
NetC56_2: C56.2 U20.1
NetC62_1: C62.1 R116.2 R119.1 U11.2 | length 0.2
  Top Layer w0.5: R116.2@36.262,45.513 R116.2@36.262,45.675
NetC63_1: C63.1 C64.1 R117.2 R120.2 VR4.3 | length 5.3
  Top Layer w0.75: R117.2@90.234,98.02 R120.2@90.234,101.794 ; C64.1@92.821,97.795 93.477,97.139 VR4.3@94.045,97.139
NetD1_4: D1.4 R61.2 R62.2
NetD2_2: D2.2 R48.1 | length 3
  Top Layer w0.5: R48.1@157.2,62.112 157.2,62.116 157.2,62.175 158.75,63.725 D2.2@158.75,64.45
NetD4_1: D4.1 L16.1 R49.2 | length 2.1
  Top Layer w1: L16.1@66.425,36.99 D4.1@66.425,39.1
NetD4_2: D4.2 L17.1 Q3.2 Q3.4 | length 6.9
  Top Layer w1: Q3.2@61.925,43.425 61.925,40.5 D4.2@63.275,39.15 ; L17.1@63.325,36.99 D4.2@63.325,39.05
NetD5_1: D5.1 D5.3 J1.1
NetD5_2: D5.2 R87.1 R91.1 RL1.12 | length 5.4
  Top Layer w0.5: 53.55,51.975 53.669,52.094 R91.1@57.055,52.094 R87.1@58.93,52.094
NetD7_1: D7.1 Q9.3 RL1.A1 | length 16.1
  Top Layer w0.75: Q9.3@56.23,61.455 v1(56.23,63.179) 56.23,64.445
  Mid-Layer 2 w0.75: RL1.A1@44.95,58.925 46.225,60.2 53.275,60.2 56.225,63.15 56.225,63.179 v1@56.225,63.2
NetL11_1: L11.1 R100.2 U26.2 | length 16.9
  Top Layer w0.3: v1(20.75,73) U26.2@22.16,73
  Mid-Layer 2 w0.2: 9.4,81.95 10.275,81.075 11.525,81.075 13.325,79.275 13.325,78.6 17.525,74.4 18.925,73 v1(20.75,73)
  other v1: 9.975,86.125
NetL12_1: L12.1 R54.2 U26.4 | length 17.7
  Top Layer w0.2: v1(19.515,73.701) 19.515,72.926 20.741,71.7 U26.4@22.16,71.7
  Mid-Layer 2 w0.2: 11.775,84.2 15.55,80.425 15.55,77.5 19.432,73.618 v1@19.444,73.606
  other v1: 11.475,89.95
NetL13_1: L13.1 R99.2 U26.6 | length 21.4
  Top Layer w0.3: v1@20.725,70.375 v1(20.75,70.375) U26.6@22.135,70.375
  Top Layer w0.5: R99.2@5.475,76.887 v1(5.475,75.875) 5.85,75.875 L13.1@6.41,76.435
  Mid-Layer 2 w0.2: v1@5.475,75.85 5.475,75.45 10.125,70.8 16.275,70.8 16.7,70.375 v1(20.75,70.375)
NetL14_1: L14.1 R98.2 U26.8 | length 26.6
  Top Layer w0.5: R98.2@7.188,75.15 v1(8.4,75.15) L14.1@8.4,76.435 ; v1@28.125,69.125 U26.8@28.125,69.7
  Mid-Layer 2 w0.15: v1(8.4,75.15) 8.4,72.985 9.735,71.65 19.566,71.65 20.316,70.9 26.35,70.9 v1(28.15,69.1)
NetL15_1: L15.1 R97.2 U26.10 | length 31.6
  Top Layer w0.3: L15.1@10,76.435 v1@10.99,76.435 ; v1(11.15,76.275) 11.15,75.9 11.55,75.5 R97.2@12.438,75.5 ; U26.10@28.15,71.05 v1@30.65,71.05
  Mid-Layer 2 w0.15: v1(11.15,76.275) 11.15,72.568 11.768,71.95 21.613,71.95 22.264,72.601 22.264,73.451 23.039,74.226 24.339,74.226 27.49,71.075 v1(30.675,71.075)
  Bottom Layer w0.15: v1(11.15,76.275) v1@11.15,76.3
NetL18_1: L18.1 R72.1 | length 4.2
  Top Layer w0.75: L18.1@64.875,36.99 R72.1@64.875,41.238
NetL20_1: L20.1 U16.3 | length 2.2
  Top Layer w0.3: v3(129.2,64.2) U16.3@129.2,65.485 ; L20.1@129.765,58.325 v3(130.675,58.325)
NetL21_1: L21.1 R77.2 U16.2 | length 9.8
  Top Layer w0.3: L21.1@129.74,62.9 129.65,62.9 128.55,64 U16.2@128.55,65.485 128.55,67.25 128.75,67.45 131.3,67.45 132.725,66.025 132.725,65.962 R77.2@132.725,65.937
NetL22_1: L22.1 R78.2 U16.6 | length 11
  Top Layer w0.3: L22.1@129.74,59.85 132.9,59.85 133.325,60.275 R78.2@133.325,61.863 ; 131.15,59.875 U16.6@131.15,65.485
NetL23_1: L23.1 R79.2 U16.8 | length 8.8
  Top Layer w0.3: L23.1@129.615,61.375 v3(130.55,61.375) ; U16.8@131.8,71.475 U16.8@131.8,71.55 ; v3(131.8,72.7) U16.8@131.8,71.55 ; R79.2@133.975,65.937 133.975,66.9 132.85,68.025 132.85,70.7 132,71.55 U16.8@131.8,71.55
NetL27_1: L27.1 L33.1 R86.2 U18.8 | length 1.9
  Top Layer w0.3: v1(140.009,69.677) 141.859,69.677 U18.8@141.909,69.627
  Bottom Layer w0.3: v1(140.009,69.677) v1@140.034,69.675
NetL28_1: L28.1 L34.1 R85.2 U18.7 | length 1.4
  Top Layer w0.3: v1(140.559,70.302) 141.834,70.302 U18.7@141.859,70.277
  Mid-Layer 2 w0.3: v1@140.534,70.3 140.547,70.313 v1@140.584,70.35
NetL29_1: L29.1 L35.1 U18.1 | length 1.3
  Top Layer w0.3: v2@140.7,74.175 140.704,74.171 U18.1@141.993,74.171
  other v2: 140.7,74.15
NetMOD1_A2: MOD1.A2 P2.1 | length 19.3
  Top Layer w0.2: MOD1.A2@166.5,48.565 166.51,48.575 v1(168.025,48.575)
  Mid-Layer 2 w0.2: P2.1@158.15,46.2 159.271,46.2 159.779,46.708 159.779,52.107 160.079,52.406 165.178,52.406 167.352,50.232 167.352,49.248 v1(168.025,48.575)
NetMOD1_A5: MOD1.A5 P5.9 | length 17.5
  Top Layer w0.15: MOD1.A5@162.11,50.175 v1(163.6,50.175) 164.485,50.175 164.928,49.732 164.928,45.808 171.463,39.272 P5.9@171.463,37.96
NetMOD1_A6: MOD1.A6 P5.7 | length 16.5
  Top Layer w0.15: MOD1.A6@166.5,50.165 166.54,50.125 v1(168.025,50.125)
  Top Layer w0.2: v1(168.025,50.125) 168.584,50.125 169.227,49.482 169.227,42.737 P5.7@173.978,37.985
NetMOD1_A7: MOD1.A7 P5.5 | length 23.9
  Top Layer w0.15: MOD1.A7@162.11,50.975 v1(163.625,50.975) 164.685,50.975 165.253,50.407 165.253,46.058 172.826,38.485 172.826,37.635 173.7,36.76 175.425,36.76 176.543,37.879 P5.5@176.543,37.96
NetMOD1_A8: MOD1.A8 P5.13 | length 24.4
  Top Layer w0.15: MOD1.A8@166.515,50.95 v1(168.2,50.95)
  Mid-Layer 1 w0.15: P5.13@166.383,37.96 166.383,38.316 167.202,39.135 170.776,39.135 174.475,42.834 174.475,47.583 171.108,50.95 v1(168.2,50.95)
NetMOD1_A9: MOD1.A9 P5.3 | length 27.6
  Top Layer w0.15: v1(160.625,51.725) 162.06,51.725 MOD1.A9@162.1,51.765
  Mid-Layer 2 w0.15: v1(160.625,51.725) 165.309,51.725 166.877,50.157 166.877,46.808 174.1,39.585 177.459,39.585 P5.3@179.083,37.96
NetMOD1_A10: MOD1.A10 P12.1 | length 31.6
  Top Layer w0.15: MOD1.A10@166.515,51.75 v1(168.025,51.75)
  Mid-Layer 1 w0.15: v1(168.025,51.75) 170.733,51.75 174.778,47.705 174.778,44.105 178.524,40.36 186.872,40.36 188.422,38.81 P12.1@188.422,36.536
NetMOD1_A13: MOD1.A13 P4.1 | length 4.7
  Top Layer w0.2: P4.1@158.075,51.725 159.715,53.365 MOD1.A13@162.1,53.365
NetMOD1_A24: MOD1.A24 P1.4 U26.5 | length 241.1
  Top Layer w0.3: v1(19.415,71.052) U26.5@22.16,71.05 ; v1(163.628,57.38) 163.643,57.365 MOD1.A24@166.5,57.365
  Mid-Layer 1 w0.15: v1(163.628,57.38) 164.453,56.555 167.545,56.555 167.952,56.148 167.952,54.956 175.1,47.808 175.1,44.259 176.729,42.629 176.729,42.621 177.55,41.8 193.1,41.8 193.425,41.475 203.35,41.475 204.259,42.384 206.617,42.384 207.292,43.059 207.292,50.029 P1.4@206.067,51.254
  Bottom Layer w0.15: v1@19.4,71.05 19.415,71.05 19.675,71.05 20.1,71.475 21.125,71.475 21.275,71.625 ; 21.275,71.602 21.275,71.625 ; v1@163.628,57.555 v1(163.628,57.38) 163.878,57.38 164.103,57.605 164.103,58.53 166.4,60.827 166.4,69.524 166.675,69.799 166.675,70.3 166.5,70.475 166.5,74.175 166.05,74.625 163.275,74.625 160.125,77.775 25.863,77.775 25.463,78.175 22.939,78.175 21.275,76.511 21.275,71.625
NetMOD1_A25: MOD1.A25 P1.3 | length 58.8
  Top Layer w0.3: MOD1.A25@162.054,58.221 162.1,58.175 v1(165.003,58.18)
  Bottom Layer w0.15: v1(165.003,58.18) 165.183,58.175 168.85,54.508 168.85,45.675 172.666,41.859 196.744,41.859 202.443,47.558 204.911,47.558 P1.3@206.061,48.707
NetMOD1_A27: MOD1.A27 R68.1 | length 216.3
  Top Layer w0.2: v1(158.529,59.68) 159.454,59.68 160.004,59.13 160.754,59.13 160.918,58.965 MOD1.A27@162.1,58.965
  Top Layer w0.5: R68.1@16.9,93.062 v1(16.9,94)
  Mid-Layer 2 w0.15: v1(16.9,94) 16.9,92.662 17.765,91.796 23.921,91.796 39.3,107.175 160.596,107.175 165.481,102.29 165.502,102.269 ; v1(158.529,59.68) 159.229,59.68 159.829,59.08 160.954,59.08 161.5,59.626 161.5,70.625 161.1,71.025 159.646,71.025 159.15,71.521 159.15,73.475 158.804,73.821 158.804,83.898 159.329,84.423 161.978,84.423 166.002,88.447 166.002,101.768 165.481,102.29
NetMOD1_A28: MOD1.A28 U26.9 | length 166
  Top Layer w0.3: U26.9@28.15,70.4 v1@29.55,70.4
  Top Layer w0.5: v1(163.628,58.955) MOD1.A28@166.427,58.955
  Bottom Layer w0.15: v1(29.575,70.425) 28.663,71.337 28.663,76.05 30.087,77.475 159.7,77.475 163.05,74.125 165.775,74.125 166.05,73.85 166.05,67.075 ; v1(163.628,58.955) 164.103,58.955 166.1,60.951 166.1,67.025 166.05,67.075 ; 166.05,67.025 166.05,67.075
NetMOD1_A29: MOD1.A29 R67.1 | length 209.2
  Top Layer w0.3: R67.1@17.362,85.9 v1(18.3,85.9) ; v1(160.625,59.75) 161.999,59.75 MOD1.A29@162.053,59.805
  Mid-Layer 2 w0.15: v1(18.3,85.9) 18.45,85.9 39.425,106.875 160.471,106.875 165.652,101.694 165.652,88.572 161.828,84.748 159.204,84.748 158.504,84.048 158.504,73.646 158.85,73.3 158.85,71.397 159.522,70.725 160.95,70.725 161.2,70.475 161.2,60.351 160.612,59.763 v1@160.604,59.755
NetMOD1_A30: MOD1.A30 P1.2 U26.11 | length 219
  Top Layer w0.3: U26.11@28.15,71.7 v1(29.575,71.7)
  Top Layer w0.5: v1@163.628,59.765 MOD1.A30@166.5,59.765
  Mid-Layer 1 w0.15: v1@163.628,59.765 163.635,59.772 164.263,60.4 167.881,60.4 169.377,58.905 169.377,53.955 175.45,47.882 175.45,44.359 177.708,42.1 197.175,42.1 198.075,43 204.05,43 204.875,43.825 204.875,45.025 206.045,46.195 P1.2@206.075,46.225
  Bottom Layer w0.15: v1(29.575,71.7) 30.186,71.7 30.575,72.089 30.575,75.763 31.987,77.175 159.575,77.175 163.05,73.7 165.4,73.7 165.625,73.475 165.625,69.05 165.025,68.45 165.025,60.325 ; v1(163.628,59.78) 164.504,59.78 165.025,60.301
NetMOD1_A31: MOD1.A31 P1.6 | length 67.8
  Top Layer w0.3: MOD1.A31@162.054,60.621 162.083,60.65 162.1,60.65 v1@163.575,60.65
  Mid-Layer 1 w0.15: v1(163.6,60.625) 163.675,60.7 168.006,60.7 169.751,58.955 169.751,54.005 175.825,47.931 175.825,44.458 177.883,42.4 197.051,42.4 198.001,43.35 202.425,43.35 204.917,45.842 204.917,55.181 206.067,56.33 P1.6@206.067,56.334
NetMOD1_A113: MOD1.A113 P11.11 | length 110.2
  Top Layer w0.3: v1(160.154,93.521) 160.304,93.371 MOD1.A113@161.953,93.371
  Mid-Layer 2 w0.15: P11.11@103.968,26.338 103.968,26.413 105.368,27.813 105.368,29.662 102.919,32.112 102.919,40.56 108.334,45.975 131.628,45.975 143.758,58.105 143.758,65.953 144.533,66.728 ; 144.525,66.75 144.525,80.946 ; 144.533,80.924 144.549,80.924 146.1,82.475 149.85,82.475 159.75,92.375 ; 159.751,92.375 160.154,92.778 v1(160.154,93.521)
NetMOD1_A114: MOD1.A114 U8.1 | length 61.8
  Top Layer w0.15: U8.1@152.222,50.372 152.236,50.386 v1(153.383,50.386) ; v1(164.302,93.411) 166.444,93.411 166.449,93.416 MOD1.A114@166.454,93.421
  Mid-Layer 2 w0.15: v1(153.383,50.386) 153.98,50.983 153.98,51.932 153.731,52.182 152.118,52.182 151.812,52.488 151.812,66.272 150.156,67.927 147.657,67.927 145.608,69.977 145.608,77.383 160.375,92.15 163.041,92.15 v1(164.302,93.411)
NetMOD1_A115: MOD1.A115 U8.2 | length 57.2
  Top Layer w0.15: U8.2@152.222,51.572 v1@153.365,51.572 ; v1(160.594,94.224) 162.051,94.224 MOD1.A115@162.054,94.221
  Mid-Layer 2 w0.15: v1@153.356,51.582 152.206,51.582 151.506,52.281 151.506,66.153 150.056,67.603 147.557,67.603 145.308,69.852 145.308,77.508 160.15,92.35 160.725,92.925 160.725,94.093 v1(160.594,94.224)
  other v1: 153.383,51.554
NetMOD1_B67: MOD1.B67 R46.1 | length 83
  Top Layer w0.15: MOD1.B67@197.654,75.021 197.7,75.021 198.948,75.021 v1(199.151,74.818)
  Top Layer w0.3: R46.1@154.855,30.087 154.889,30.053 154.905,30.037 v1(155.83,30.037)
  Mid-Layer 2 w0.15: v1@155.805,30.037 v1(155.83,30.037) 180.249,30.037 184.123,33.911 184.123,40.634 194.55,51.062 194.55,63.95 195.525,64.925 199.475,64.925 199.969,65.419 199.969,74.631 199.782,74.818 v1(199.151,74.818)
NetMOD1_B69: MOD1.B69 R45.1 | length 85.2
  Top Layer w0.15: MOD1.B69@197.654,75.821 197.7,75.821 198.987,75.821 v1(199.151,75.656)
  Top Layer w0.3: R45.1@154.93,28.638 154.955,28.663 v1(155.78,28.663)
  Mid-Layer 2 w0.15: v1(155.78,28.663) 179.824,28.663 184.523,33.361 184.523,40.41 195.004,50.891 195.011,50.891 195.011,62.982 195.697,63.668 199.899,63.668 200.269,64.037 200.269,75.123 199.735,75.656 v1(199.151,75.656)
NetP3_1: P3.1 R121.2 R122.2
NetQ1_1: Q1.1 R64.2 R65.2 | length 28.7
  Top Layer w0.5: R65.2@32.087,42.659 32.12,42.693 32.162,42.734 v1(32.911,42.734) ; v1(55.506,47.908) 56.475,47.908 56.48,47.908 Q1.1@56.505,47.933 ; Q1.1@56.475,47.9 56.561,47.9 R64.2@57.868,49.207
  Mid-Layer 2 w0.15: v1(32.911,42.734) 36.66,42.734 42.034,48.108 55.306,48.108 v1(55.506,47.908)
NetQ1_2: Q1.2 R71.1 | length 2.1
  Top Layer w0.5: R71.1@56.538,43.8 56.538,44.663 Q1.2@57.425,45.55
NetQ2_1: Q2.1 R55.1
NetQ3_1: Q3.1 R71.2 R80.1 | length 1.3
  Top Layer w1: R80.1@58.062,42.512 R71.2@58.062,43.8
NetQ3_3: Q3.3 R74.2 R81.1 | length 31
  Top Layer w0.5: R74.2@43.025,49.987 v1@43.025,50.848
  Top Layer w0.75: Q3.3@64.225,43.425 64.225,45.9 65.351,47.026 R81.1@66.575,47.026
  Mid-Layer 2 w0.5: v1(43.034,50.857) 43.034,50.432 44.409,49.057 63.189,49.057 64.221,48.025 v1@66.503,48.025
  other v1: 66.503,48.108
NetQ4_1: Q4.1 Q6.3 R63.2 | length 5.4
  Top Layer w0.75: Q6.3@15.55,89.275 15.55,89.25 16.875,87.925 Q4.1@17.7,87.925 17.725,87.9 19.162,87.9 R63.2@20,88.738
NetQ4_2: Q4.2 R61.1 | length 2.1
  Top Layer w0.5: R61.1@15.65,91.488 15.65,90.375 Q4.2@16.65,90.375
NetQ5_1: Q5.1 Q7.3 R66.2 VR1.1
  other v1: 21.225,93.725 23.525,93.75 24.8,93.775 12.275,100.45 8.725,100.55 12.3,101.575 8.675,101.625
NetQ6_1: Q6.1 R67.2 | length 2
  Top Layer w0.3: Q6.1@14.6,86.925 14.6,86.3 15,85.9 R67.2@15.838,85.9
NetQ7_1: Q7.1 R68.2 | length 2.4
  Top Layer w0.5: R68.2@16.9,91.538 18.038,91.538 18.525,92.025 Q7.1@19.125,92.025
NetQ8_2: Q8.2 R109.1 | length 2.8
  Top Layer w0.5: R109.1@60.542,53.556 60.879,53.556 61.789,54.465 Q8.2@61.789,55.599
NetQ8_3: Q8.3 R87.2 S2.1 S2.2 | length 175.5
  Top Layer w0.5: R87.2@60.567,52.207 61.854,52.207 62.754,53.106 Q8.3@62.754,53.44 ; Q8.3@62.829,53.356 v1(63.754,53.356)
  Bottom Layer w0.15: v1(63.754,53.356) 63.754,42.729 65.032,41.45 88.325,41.45 97.425,32.35 97.425,28.325 98.3,27.45 99.375,27.45 99.975,26.85 99.975,16.35 102.45,13.875 144.475,13.875 146.55,11.8 195.528,11.8 v1(201.143,17.415)
NetQ9_1: Q9.1 R89.2 S2.3 S2.4 VR3.3 | length 186
  Top Layer w0.75: Q9.1@60.83,61.455 VR3.3@60.83,63.288
  Mid-Layer 2 w0.15: v1@62.625,63.05 62.654,63.05 74.1,63.05 88.175,48.975 88.175,14.35 91.625,10.9 v2(95.85,10.9)
  Bottom Layer w0.15: v2(95.85,10.9) 96.45,11.5 193.5,11.5 201.325,3.675 v1(201.325,3.625)
  other v1: 62.654,63.054
NetQ9_2: Q9.2 Q9.4 R91.2 | length 2.1
  Top Layer w0.5: R91.2@57.055,53.618 57.055,54.006 Q9.4@58.28,55.231
NetR44_2: R44.2 U8.29 | length 1.4
  Top Layer w0.3: R44.2@146.622,47.01 U8.29@146.622,48.372
NetR50_2: R50.2 U5.4 U21.3 | length 201.1
  Top Layer w0.3: v2(156.7,90.225) 157.05,89.875 U5.4@157.05,88.71 R50.2@157.05,87.162
  Top Layer w0.5: U21.3@20.675,61.225 v2(20.675,62.5)
  Mid-Layer 2 w0.15: v2(20.675,62.5) 20.675,64.8 21.675,65.8 27.526,65.8 31.2,69.474 31.2,75.35 27.25,79.3 27.25,93.375 40.175,106.3 158.85,106.3 161.225,103.925 161.225,95.35 160.7,94.825 160.45,94.825 160.069,94.444 160.069,94.246 159.625,93.801 159.625,92.675 157.175,90.225 v2(156.7,90.225)
NetR52_2: R52.2 U14.10
NetR53_2: R53.2 R70.1 U9.11 U11.7 | length 23.6
  Top Layer w0.3: U9.11@28.901,41.745 R53.2@30.471,41.745 ; v1@30.287,40.385 v1(30.312,40.41) 30.514,40.611 R53.2@30.514,41.475
  Top Layer w0.5: U11.7@44.881,45.06 45.977,45.06 R70.1@46.45,44.587 46.45,45.441 v1@46.458,45.449
  Mid-Layer 2 w0.15: v1(30.312,40.41) 40.36,40.41 45.408,45.458 v1(46.458,45.458)
NetR55_2: R55.2 U15.4
NetR57_1: R57.1 U14.1
NetR65_1: R65.1 U9.12 | length 1.7
  Top Layer w0.3: U9.12@28.901,42.395 29.821,42.395 30.126,42.7 R65.1@30.451,42.7
NetR73_2: R73.2 R75.2 R77.1 R78.1 R79.1 | length 11.2
  Mid-Layer 2 w0.5: 13.75,29.563 14.25,30.063 14.25,32.125 14.15,32.225 14.15,35.8 15.15,36.8 15.15,40.125